# EAGLE board SOL_R1 (EAGLE 7.7.0)
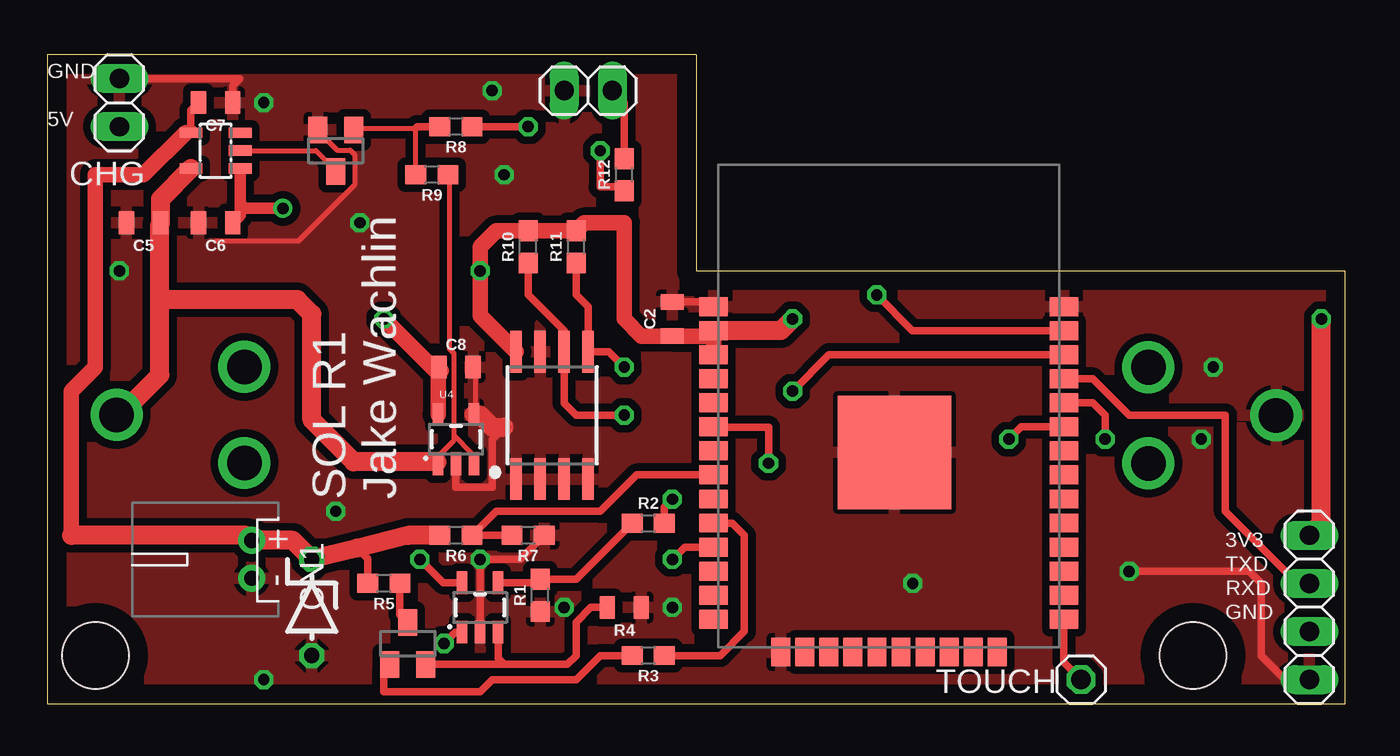
[diagram p0: board, top side]
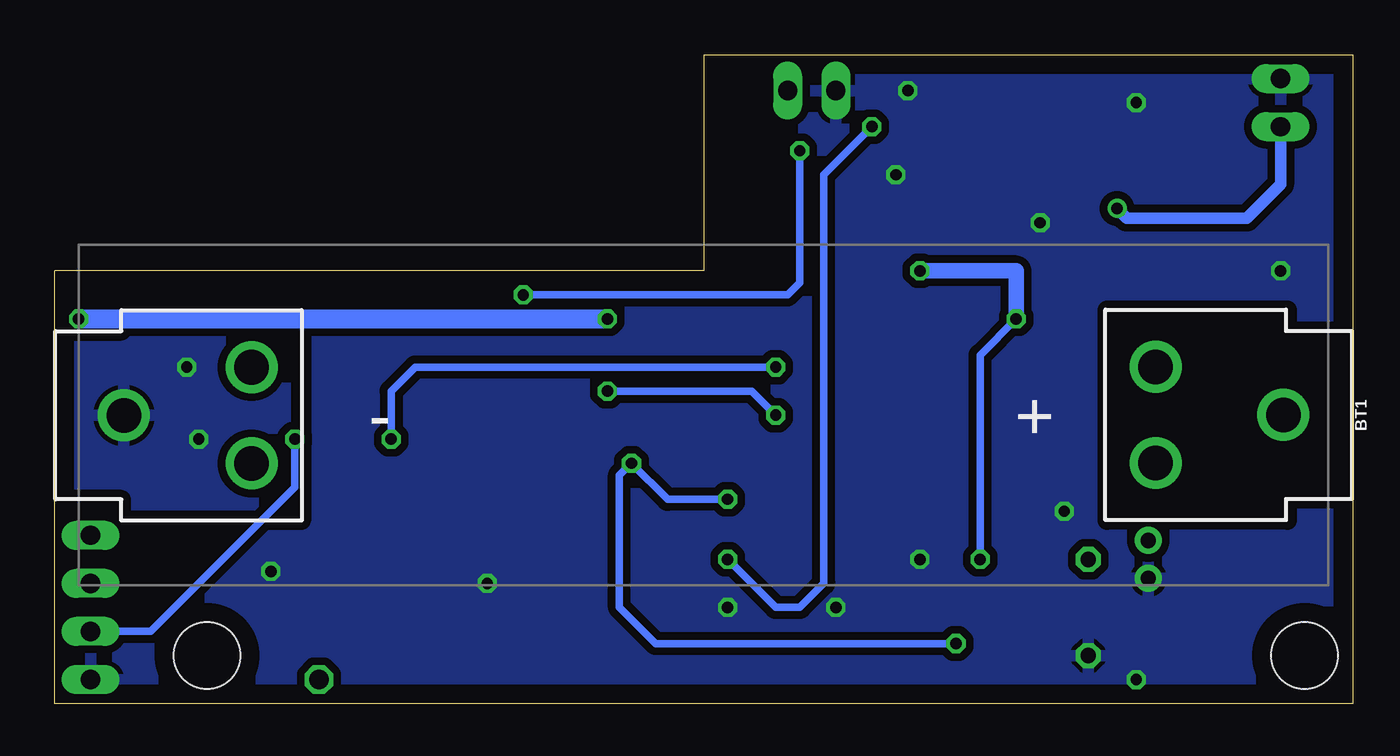
[diagram p1: board, bottom side, seen from below]

Size 68.58 x 34.29 mm. Coordinates in mm from the lower left corner, seen from the top.
Outline: 0,0 68.58,0 68.58,22.86 34.29,22.86 34.29,34.29 0,34.29 0,0
Copper layers (1*16): Top 0.035mm / dielectric 1.5mm / Bottom 0.035mm
Design rules "default": minimum track width 10mil, minimum drill 24mil, track to track 8mil, track to pad 8mil, pad to pad 8mil, via to via 8mil, smd to smd 8mil, copper to edge 40mil, drill to drill 8mil, minimum pad ring 10mil, minimum via ring 8mil, stop-mask expansion 4mil, vias tented up to drill 0mil, thermal gap 10mil
Holes 3.51 mm at 2.54,2.54 60.53,2.54

## Footprints (pad centres in the part's own frame; a part is rotated, then mirrored left to right if it is on the bottom)
BATTERY_18650-HOLDER = drill 1.829: GND@1 30.628,0.01; GND@2 23.88,2.55; GND@3 23.88,-2.53; PWR@1 -30.628,-0.01; PWR@2 -23.88,2.53; PWR@3 -23.88,-2.55
0805 = smd 0.8 x 1.2: 1 -0.9,0; 2 0.9,0
1X02 = drill 1.016 long: 1 -1.27,0; 2 1.27,0
JST-PH-2-THM-RA = drill 0.8 pad 1.422: 1 1,0; 2 -1,0
ZDIO-5 = drill 0.813 octagon: A 2.54,0; C -2.54,0
SOT23-5L = smd 0.55 x 1.2: 1 -0.95,-1.3; 2 0,-1.3; 3 0.95,-1.3; 4 0.95,1.3; 5 -0.95,1.3
1X04 = drill 1.016 long: 1 -3.81,0; 2 -1.27,0; 3 1.27,0; 4 3.81,0
SOT23 = smd 1 x 1.4: 1 -0.95,-1.1; 2 0.95,-1.1; 3 0,1.1
0603 = smd 1.1 x 1: 1 -0.85,0; 2 0.85,0
1X01 = drill 1.016 octagon: 1 0,0
ESP-WROOM-32 = smd 1.5 x 1: 1 -9.25,7; 2 -9.25,5.73; 3 -9.25,4.46; 4 -9.25,3.19; 5 -9.25,1.92; 6 -9.25,0.65; 7 -9.25,-0.62; 8 -9.25,-1.89; 9 -9.25,-3.16; 10 -9.25,-4.43; 11 -9.25,-5.7; 12 -9.25,-6.97; 13 -9.25,-8.24; 14 -9.25,-9.51; 25 9.25,-9.51; 26 9.25,-8.24; 27 9.25,-6.97; 28 9.25,-5.7; 29 9.25,-4.43; 30 9.25,-3.16; 31 9.25,-1.89; 32 9.25,-0.62; 33 9.25,0.65; 34 9.25,1.92; 35 9.25,3.19; 36 9.25,4.46; 37 9.25,5.73; 38 9.25,7 | smd 1 x 1.5: 15 -5.7,-11.25; 16 -4.43,-11.25; 17 -3.16,-11.25; 18 -1.89,-11.25; 19 -0.62,-11.25; 20 0.65,-11.25; 21 1.92,-11.25; 22 3.19,-11.25; 23 4.46,-11.25; 24 5.73,-11.25 | smd 6 x 6: GND 0.3,-0.7
SO08-EIAJ = smd 0.61 x 2.21: 1 -1.905,-3.378; 2 -0.635,-3.378; 3 0.635,-3.378; 4 1.905,-3.378; 5 1.905,3.353; 6 0.635,3.353; 7 -0.635,3.353; 8 -1.905,3.353
SOT23-5 = smd 0.55 x 1.2: 1 -0.95,-1.3; 2 0,-1.3; 3 0.95,-1.3; 4 0.95,1.3; 5 -0.95,1.3

## Placement (x,y rotation side)
BT1  [BATTERY_18650-HOLDER]  34.29,15.24 180 bottom
C2  1.0uF  [0805]  33.02,20.32 90 top
C5  1.0uF  [0805]  5.08,25.4 180 top
C6  1.0uF  [0805]  8.89,25.4 180 top
C7  1.0uF  [0805]  8.89,31.75 180 top
C8  1.0uF  [0805]  21.59,17.78 0 top
CHG  [1X02]  3.81,31.75 90 top
CN1  [JST-PH-2-THM-RA]  10.79,7.62 90 top
D2  7.5V  [ZDIO-5]  13.97,5.08 270 top
IC1  MAX1555  [SOT23-5L]  8.89,29.21 90 top
LED  [1X02]  28.57,32.38 180 top
PROG  [1X04]  66.67,5.08 270 top
Q2  [SOT23]  15.24,29.21 180 top
Q3  [SOT23]  19.05,3.17 0 top
R1  1k  [0603]  26.04,5.71 90 top
R2  100k  [0603]  31.75,9.53 0 top
R3  330  [0603]  31.75,2.54 180 top
R4  0.75  [0805]  30.48,5.08 180 top
R5  5.1  [0603]  17.78,6.35 180 top
R6  47k  [0603]  21.59,8.89 180 top
R7  15k  [0603]  25.4,8.89 180 top
R8  330  [0603]  21.59,30.48 180 top
R9  47k  [0603]  20.32,27.94 180 top
R10  4.7k  [0603]  25.4,24.13 90 top
R11  4.7k  [0603]  27.94,24.13 90 top
R12  330  [0603]  30.48,27.94 90 top
TOUCH  [1X01]  54.61,1.27 0 top
U2  ESP-WROOM-32  [ESP-WROOM-32]  44.45,13.97 0 top
U3  I2C EEPROM  [SO08-EIAJ]  26.67,15.24 0 top
U4  3.3V/150mA  [SOT23-5]  21.59,13.97 0 top
U$1  OPA344  [SOT23-5]  22.86,5.08 0 top

## Library data of the parts
BT1 = SparkFun-Batteries; PROD_ID: BATT-12327; SF_SKU: PRT-13113
C2 C5-C8 = SparkFun-Capacitors; PROD_ID: CAP-08064
CHG LED PROG TOUCH = pinhead
CN1 Q2 Q3 = adafruit
D2 = diode
IC1 = maxim; MF: MAXIM; MPN: MAX1555EZK+T; OC_FARNELL: 1628222; OC_NEWARK: 59J2761
R1-R3 R8 R12 = SparkFun-Resistors; PROD_ID: RES-08272
R4 = SparkFun-Resistors; PROD_ID: RES-11622
R5 = SparkFun-Resistors; PROD_ID: RES-08270
R6 R9 = SparkFun-Resistors; PROD_ID: RES-07871
R7 = SparkFun-Resistors; PROD_ID: RES-07854
R10 R11 = SparkFun-Resistors; PROD_ID: RES-07857
U2 = esp32
U3 = SparkFun-IC-Memory; PROD_ID: NA-XXXXX
U4 = SparkFun-IC-Power; PROD_ID: VREG-00822
U$1 = SparkFun-IC-Amplifiers; PROD_ID: IC-08251

## Nets
+3V3: C2.1 C8.1 PROG.1 R10.2 R11.2 U2.2 U2.3 U3.8 U4.5 U$1.5
+5V: C6.1 CHG.1 IC1.1
CHG_DISABLE: R8.1 U2.11
DAC: R3.1 U2.10
GND: BT1.GND@1 C2.2 C5.2 C6.2 C7.1 C8.2 CHG.2 CN1.2 D2.A LED.2 PROG.4 Q2.2 R1.1 R4.1 R7.1 U2.1 U2.15 U2.38 U2.GND U3.1 U3.2 U3.3 U3.4 U3.7 U4.2 U4.4 U$1.2
I_SENSE: Q3.2 R4.2 U$1.3
I_SENSE_AMP: R2.2 U2.6 U$1.1
LED: R12.1 U2.37
N$1: R1.2 R2.1 U$1.4
N$3: LED.1 R12.2
N$5: Q3.1 R3.2
N$6: IC1.2 Q2.3
N$7: Q3.3 R5.1
N$8: Q2.1 R8.2 R9.2
RXD: PROG.3 U2.34
SCL: R10.1 U2.36 U3.6
SDA: R11.1 U2.33 U3.5
TOUCH: TOUCH.1 U2.25
TXD: PROG.2 U2.35
V_BATT: BT1.PWR@1 C5.1 IC1.5 R9.1 U4.1 U4.3
V_SENSE: R6.1 R7.2 U2.8
V_SOLAR: C7.2 CN1.1 D2.C IC1.4 R5.2 R6.2

## Tracks (layer width: path | path; a pad name or v marks a point on that pad's centre or on a via)
+3V3  (via drill 0.6)
  Top 0.254: 20.8,15.29 U4.5 | 20.8,17.58 C8.1
  Top 0.406: U$1.5 20.93,6.38 v19.68,7.62
  Top 0.61: 20.8,17.58 20.64,17.41
  Top 0.813: 20.64,17.41 U4.5 | U2.3 U2.2 34.92,19.42 C2.1 31.38,19.42 30.48,20.32 30.48,25.4 28.36,25.4 R11.2 R10.2 23.71,24.98 22.86,24.13 v22.86,22.86 22.86,20.5 U3.8 | 20.8,17.58 20.52,17.58 v17.78,20.32
  Top 1.016: v67.31,20.32 67.31,9.53 PROG.1 | v39.37,20.32 38.75,19.7 U2.2
  Bottom 0.406: v19.68,7.62 19.68,18.41 v17.78,20.32
  Bottom 0.813: v17.78,20.32 17.78,22.86 v22.86,22.86
  Bottom 1.016: v67.31,20.32 v39.37,20.32
+5V  (via drill 0.6)
  Top 0.61: IC1.1 10.19,26.42 | 10.19,26.42 10.19,25.8 C6.1 | v12.45,26.16 10.44,26.16 10.19,26.42
  Bottom 0.61: CHG.1 3.81,27.43 5.59,25.65 11.94,25.65 v12.45,26.16
CHG_DISABLE  (via drill 0.6)
  Top 0.406: U2.11 33.67,8.27 v33.02,7.62 | R8.1 v25.4,30.48
  Bottom 0.406: v33.02,7.62 30.48,5.08 29.21,5.08 27.94,6.35 27.94,27.94 v25.4,30.48
DAC
  Top 0.406: U2.10 36.18,9.54 36.83,8.89 36.83,3.81 35.56,2.54 R3.1
GND  (via drill 0.6)
  Top 0.254: 8.91,24.43 13.26,24.43 16.23,27.41 16.23,29.01 16,29.23 15.32,29.23 14.4,30.15 Q2.2 14.17,30.38 | 8,25.35 C6.2 | C8.2 22.63,17.58 22.63,15.29 U4.4
  Top 0.406: U2.1 34.95,21.22 C2.2 | CHG.2 10.16,33.02 9.79,32.65 C7.1 | U$1.2 v22.86,7.62 24.98,7.62 R7.1 | PROG.4 65.41,1.27 64.14,2.54 64.14,6.35 63.5,6.99 v57.15,6.99 | 24.13,14.61 23.5,13.97 23.5,11.43 21.59,11.43 U4.2
  Top 1.016: U4.4 22.57,15.24 22.86,15.24 23.5,14.61 24.13,14.61
  other vias: 11.43,1.27 15.24,10.16 33.02,5.08 45.72,6.35 16.51,25.4 24.13,27.94 11.43,31.75 3.81,22.86 27.3,5.08 27.3,5.08 23.5,32.38 61.59,17.78 60.96,13.97
  pour Top (isolate 0.406): -2.54,0 70.87,0 70.87,31.75 36.32,31.75 36.32,35.31 -2.54,35.31
  pour Bottom (isolate 0.406): -1.27,-0.25 71.63,-0.25 71.63,31.75 36.32,31.75 36.32,35.31 -1.27,35.31
I_SENSE
  Top 0.406: R4.2 28.72,5.08 27.94,4.3 27.94,2.54 27.48,2.08 24.13,2.08 | Q3.2 24.13,2.08 | U$1.3 23.81,2.4 24.13,2.08
I_SENSE_AMP  (via drill 0.6)
  Top 0.406: R2.2 32.6,10.38 v33.02,10.79 | v38.1,12.7 38.1,14.61 35.22,14.61 U2.6 | U$1.1 21.56,3.78 v20.95,3.17
  Bottom 0.406: v33.02,10.79 36.2,10.79 v38.1,12.7 38.73,12.06 38.73,5.08 36.83,3.17 v20.95,3.17
LED  (via drill 0.6)
  Top 0.406: U2.37 45.7,19.7 v43.81,21.59 | v29.21,29.21 29.21,27.3 30.27,27.3 R12.1
  Bottom 0.406: v43.81,21.59 29.84,21.59 29.21,22.23 v29.21,29.21
N$1
  Top 0.406: U$1.4 25.85,6.38 R1.2 27.94,6.57 R2.1
N$3
  Top 0.406: R12.2 30.48,31.75 LED.1
N$5
  Top 0.406: Q3.1 17.78,1.75 17.78,0.64 22.86,0.64 23.5,1.27 27.94,1.27 29.21,2.54 R3.2
N$6
  Top 0.254: Q2.3 15.09,28.32 14.2,29.21 IC1.2
N$7
  Top 0.406: R5.1 18.63,4.7 Q3.3
N$8
  Top 0.254: R9.2 19.43,28.09 19.43,30.38 16.23,30.38 Q2.1
  Top 0.406: R8.2 19.53,30.48 19.43,30.38
RXD  (via drill 0.6)
  Top 0.406: U2.34 55.23,15.89 55.88,15.24 v55.88,13.97
  Bottom 0.406: v55.88,13.97 55.88,11.43 63.5,3.81 PROG.3
SCL  (via drill 0.6)
  Top 0.406: R10.1 25.4,21.59 27.3,19.68 U3.6 27.3,15.88 27.94,15.24 v30.48,15.24 | U2.36 41.29,18.43 v39.37,16.51
  Bottom 0.406: v39.37,16.51 31.75,16.51 v30.48,15.24
SDA  (via drill 0.6)
  Top 0.406: R11.1 27.94,21.59 28.57,20.95 U3.5 29.67,18.59 v30.48,17.78 | v50.8,13.97 51.45,14.62 U2.33
  Bottom 0.406: v30.48,17.78 49.53,17.78 50.8,16.51 v50.8,13.97
TOUCH
  Top 0.406: U2.25 53.7,2.18 TOUCH.1
TXD
  Top 0.406: U2.35 55.23,17.16 57.15,15.24 62.23,15.24 62.23,10.16 66.04,6.35 PROG.2
V_BATT
  Top 0.254: 21.49,14.15 21.49,13.92 20.8,13.23 20.8,12.78 U4.1 20.57,12.78 | 21.49,14.15 21.49,18.49 21.26,18.72 21.26,27.86 R9.1 | 21.49,14.15 22.4,13.23 22.4,12.78 U4.3 | 5.94,25.35 C5.1 | 3.89,15.29 BT1.PWR@1
  Top 1.016: 5.94,21.34 5.94,17.35 3.89,15.29 | 5.94,21.34 5.94,25.35 | 20.57,12.78 16.18,12.78 13.97,14.99 13.97,20.57 13.21,21.34 5.94,21.34 | C5.1 5.98,26.65 IC1.5
V_SENSE
  Top 0.406: R7.2 R6.1 23.71,10.16 29.21,10.16 31.13,12.08 U2.8
V_SOLAR
  Top 0.254: 7.77,30.38 IC1.4
  Top 0.406: 7.3,30.16 IC1.4 7.59,31.35 C7.2 | R5.2 16.93,7.65 16.36,8.22
  Top 0.813: 7.3,30.16 5.08,27.94 2.54,27.94 2.54,17.78 1.27,16.51 1.27,8.89
  Top 1.016: R6.2 19.05,8.89 16.36,8.22 D2.C 12.97,8.62 CN1.1 10.53,8.89 1.27,8.89

## Text on the board
tPlace: GND | 5V | SOL R1 / Jake Wachlin | 3V3 | TXD | RXD | GND